# Altium PCB First attempt Science PCB.PcbDoc
Units mm, origin at the board's own origin, x right, y up, seen from the top; angles counter-clockwise.
Board outline 226.44 x 159.77 mm, 2 copper layers (Top Layer, Bottom Layer); 136 components, 117 nets, 420 pads, 18 vias.
Unrouted connection lines stored in the file: 47.
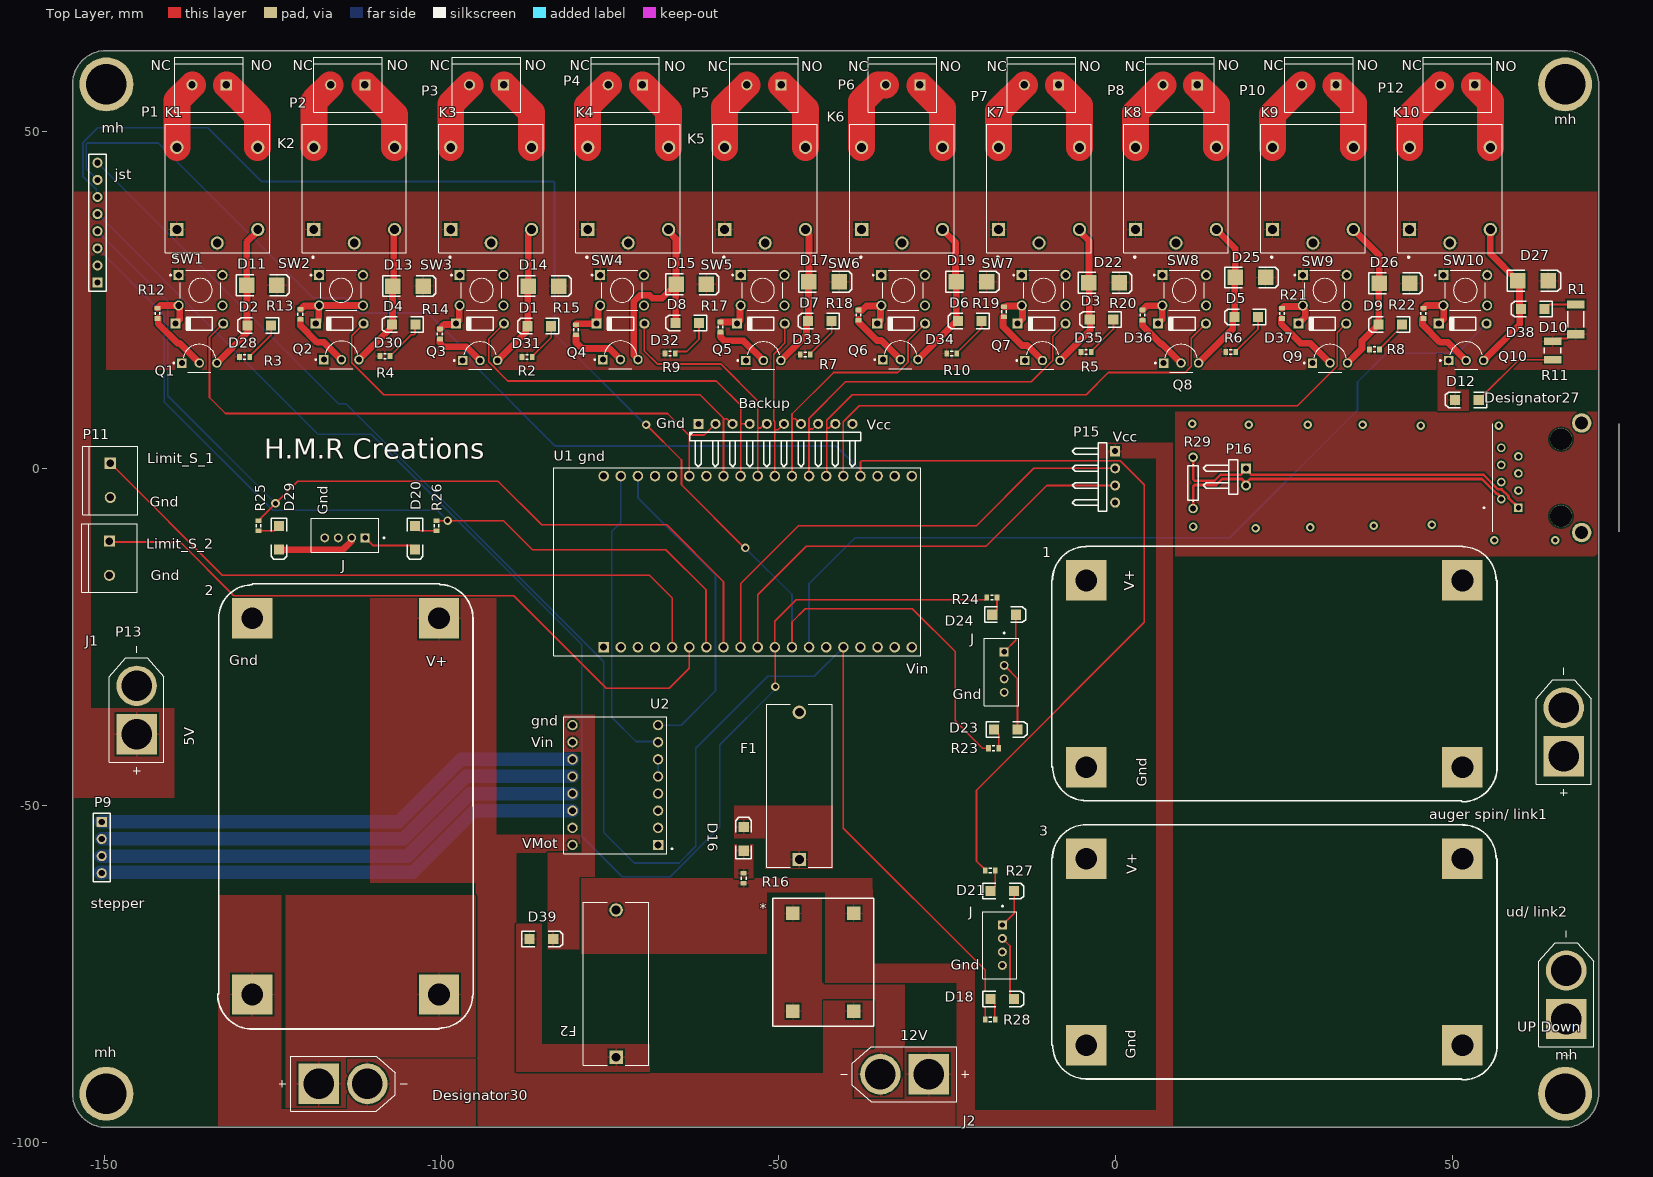
[diagram p0: Top Layer view]
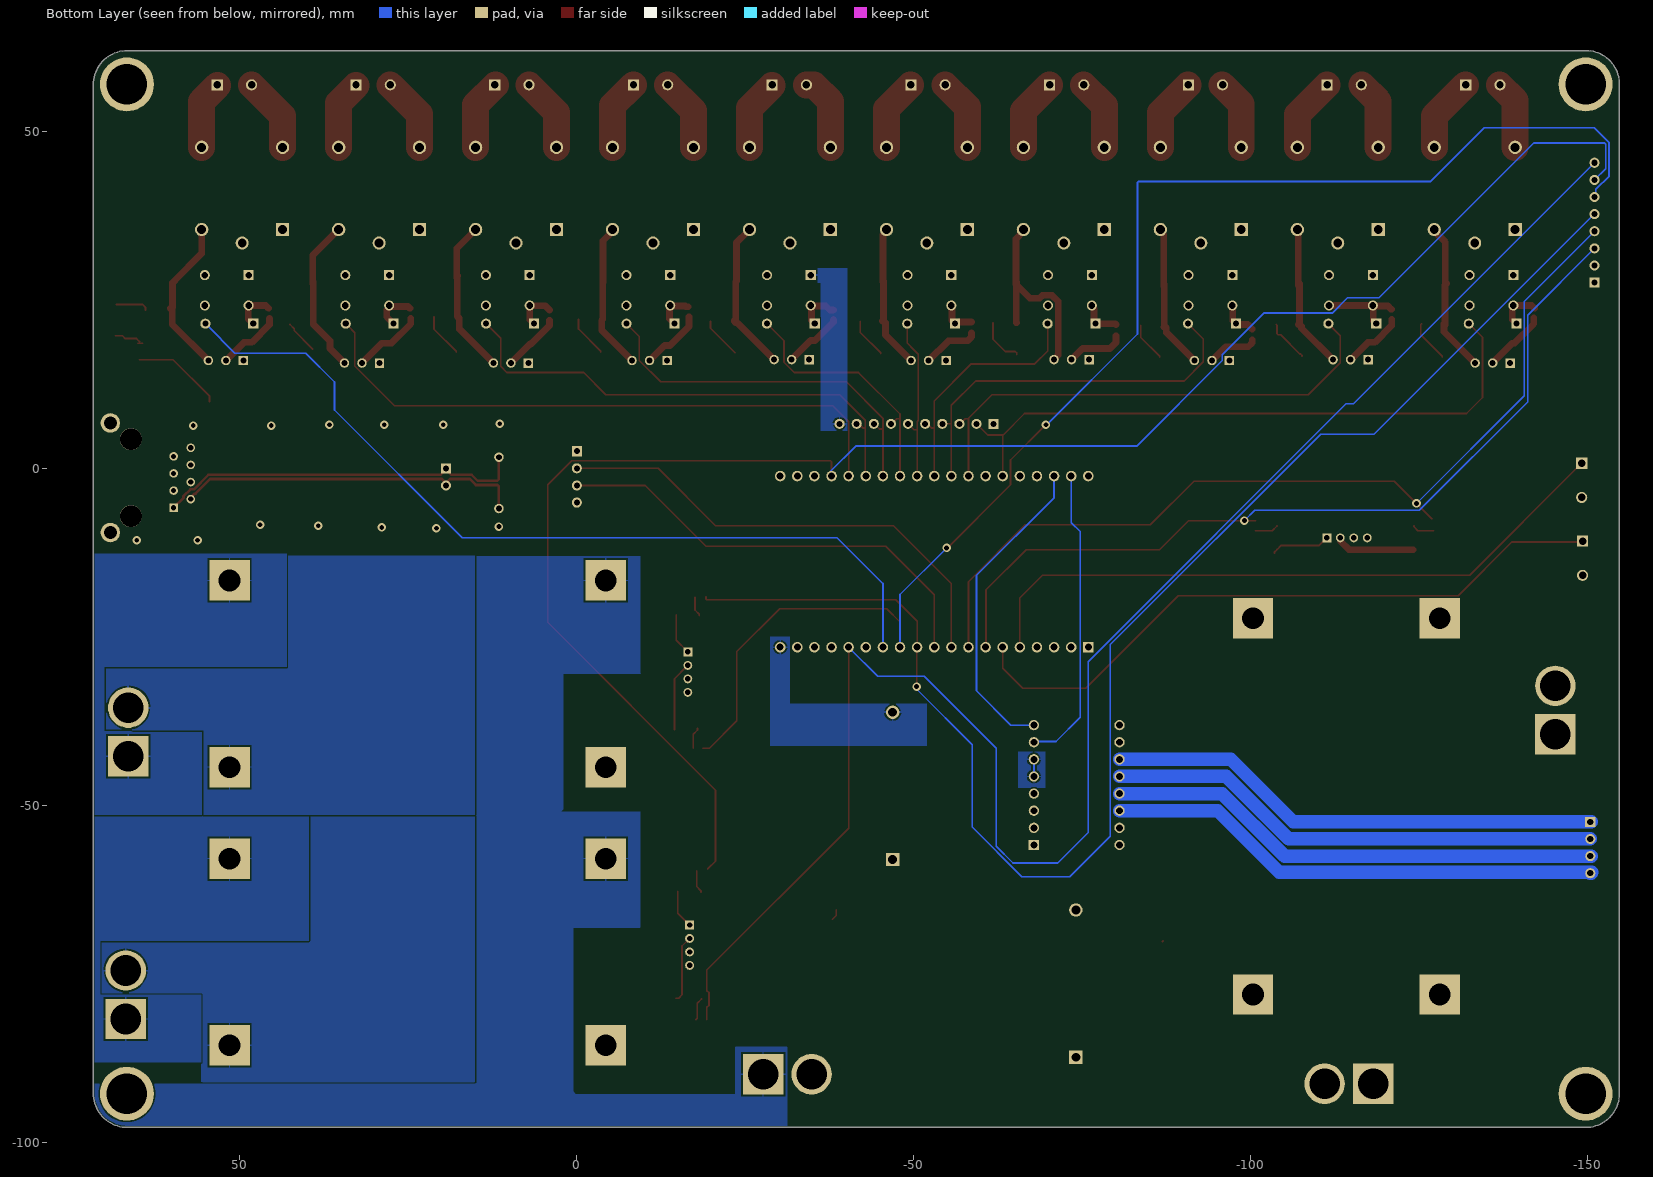
[diagram p1: Bottom Layer view, seen from below]

## Layer stack, top to bottom
Top Solder: solder mask 0.0102, Solder Resist, Dk 3.5
Top Layer: signal copper 0.0356
Dielectric 1: dielectric 0.32, FR-4, Dk 4.8
Bottom Layer: signal copper 0.0356
Bottom Solder: solder mask 0.0102, Solder Resist, Dk 3.5

## Board outline
-154.686,-92.79 -154.686,57.023 cw(c-149.733,57.023) -149.733,61.976 66.675,61.976 cw(c66.675,56.896) 71.755,56.896 71.755,-92.71 cw(c66.675,-92.71) 66.675,-97.79 -149.686,-97.79 cw(c-149.686,-92.79)

## Design rules (kind name [scope] priority, off if disabled: settings)
BoardOutlineClearance [All] p1: gap=0.254 ignorepadtopadclearanceinfootprint=FALSE except(0: Arc-SplitContinuation Track-SplitContinuation SMDPad-SplitContinuation THPad-SplitContinuation Via-SplitContinuation Fill-SplitContinuation Poly-SplitContinuation Region-SplitContinuation Text-SplitContinuation)
Clearance [All] p1: gap=0.254 ignorepadtopadclearanceinfootprint=FALSE except(0: Arc-Hole Track-Hole SMDPad-Hole THPad-Hole Via-Hole Fill-Hole Poly-Hole Region-Hole Text-Hole)
DiffPairsRouting [All] p1: maxlimit=0.254 minlimit=0.254 mostfreqgap=0.254 toplayer_minwidth=0.381 toplayer_maxwidth=0.381 toplayer_prefwidth=0.381 bottomlayer_minwidth=0.381 bottomlayer_maxwidth=0.381 bottomlayer_prefwidth=0.381 maxuncoupledlength=12.7
PolygonConnect [All] p1: connectstyle=Relief reliefconductorwidth=0.254 reliefentries=4 polygonreliefangle="90 Angle" airgapwidth=0.254
RoutingVias [All] p1: holewidth=0.711 width=1.27 viastyle="Through Hole" minholewidth=0.711 minwidth=1.27 maxholewidth=0.711 maxwidth=1.27
SolderMaskExpansion [All] p1: expansion=0.102 istentingtop=FALSE
Width [InNetClass('New Class')] p1: maxlimit=5 minlimit=1 preferedwidth=1 minimp=50.000000 maximp=50.000000 favimp=50.000000
29 further rules are at their usual default settings.

## Classes and differential pairs
net class "New Class": NetD1_2 NetD2_2 NetD3_2 NetD4_2 NetD5_2 NetD6_2 NetD7_2 NetD8_2 NetD9_2 NetD10_2 NetD28_2 NetD29_2 NetD30_2 NetD31_2 NetD32_2 NetD33_2 NetD34_2 NetD35_2 NetD36_2 NetD37_2 NetD38_2 NetD39_2 NetQ1_2 NetQ2_2 NetQ3_2 NetQ4_2 NetQ5_2 NetQ6_2 NetQ7_2 NetQ8_2 NetQ9_2 NetQ10_2
component class Sheet2: 1 2 3 * D1 D2 D3 D4 D5 D6 D7 D8 D9 D10 D11 D12 D13 D14 D15 D16 D17 D19 D20 D21 D22 D23 D24 D25 D26 D27 D28 D29 D30 D31 D32 D33 D34 D35 D36 D37 D38 D39 F1 F2 J J1 J2 K1 K2 K3 K4 K5 K6 K7 K8 K9 K10 P1 P2 P3 P4 P5 P6 P7 P8 P9 P10 P11 P12 P13 P15 P16 Q1 Q2 Q3 Q4 Q5 Q6 Q7 Q8 Q9 Q10 R1 R2 R3 R4 R5 R6 R7 R8 R9 R10 R11 R12 R13 R14 R15 R16 R17 R18 R19 R20 R21 R22 R23 R24 R25 R26 R27 R28 R29 SW1 SW2 SW3 SW4 SW5 SW6 SW7 SW8 SW9 SW10 U1 U2
differential pair can: +can_P -can_N

## Components (designator, comment, footprint, x,y, rotation, side; value= is the part's Value field where it differs from the comment)
1 "cytron_md_horizontal_p" Cytron_md 23.622,-30.48 r270 top
2 "cytron_md_horizontal_p" Cytron_md -114.173,-50.165 r180 top
3 "cytron_md_horizontal_p" Cytron_md 23.622,-71.755 r270 top
* "micro_buck" PCBComponent_1 -43.307,-73.279 r180 top
"auger spin/ link1" "Comment" AMASS_XT60-M 66.548,-39.116 r90 top
Backup "Comment" HDR1X10H -61.849,6.604 r0 top
D1 "LED2" 3.2X1.6X1.1 -85.471,21.082 r180 top
D2 "LED2" 3.2X1.6X1.1 -127,21.209 r180 top
D3 "LED2" 3.2X1.6X1.1 -2.032,22.098 r180 top
D4 "LED2" 3.2X1.6X1.1 -105.537,21.336 r180 top
D5 "LED2" 3.2X1.6X1.1 19.431,22.479 r180 top
D6 "LED2" 3.2X1.6X1.1 -21.59,21.844 r180 top
D7 "LED2" 3.2X1.6X1.1 -43.815,21.844 r180 top
D8 "LED2" 3.2X1.6X1.1 -63.5,21.59 r180 top
D9 "LED2" 3.2X1.6X1.1 40.795,21.336 r180 top
D10 "LED2" 3.2X1.6X1.1 61.976,23.622 r180 top
D11 "D Schottky" SMB -126.619,27.178 r0 top
D12 "LED2" 3.2X1.6X1.1 52.197,10.16 r180 top
D13 "D Schottky" SMB -104.902,27.051 r0 top
D14 "D Schottky" SMB -84.836,27.051 r0 top
D15 "D Schottky" SMB -62.901,27.305 r0 top
D16 "LED2" 3.2X1.6X1.1 -55.118,-54.991 r90 top
D17 "D Schottky" SMB -43.18,27.686 r0 top
D18 "LED2" 3.2X1.6X1.1 -16.744,-78.74 r0 top
D19 "D Schottky" SMB -21.336,27.686 r0 top
D20 "LED2" 3.2X1.6X1.1 -103.886,-10.307 r270 top
D21 "LED2" 3.2X1.6X1.1 -16.744,-62.738 r0 top
D22 "D Schottky" SMB -1.651,27.559 r0 top
D23 "LED2" 3.2X1.6X1.1 -16.236,-38.735 r0 top
D24 "LED2" 3.2X1.6X1.1 -16.49,-21.717 r0 top
D25 "D Schottky" SMB 20.066,28.321 r0 top
D26 "D Schottky" SMB 41.438,27.432 r0 top
D27 "D Schottky" SMB 61.976,27.813 r0 top
D28 "Diode 1N914" DO-35 -135.89,21.463 r180 top
D29 "LED2" 3.2X1.6X1.1 -124.079,-10.307 r270 top
D30 "Diode 1N914" DO-35 -115.062,21.463 r180 top
D31 "Diode 1N914" DO-35 -94.234,21.463 r180 top
D32 "Diode 1N914" DO-35 -73.406,21.463 r180 top
D33 "Diode 1N914" DO-35 -52.578,21.463 r180 top
D34 "Diode 1N914" DO-35 -31.75,21.463 r180 top
D35 "Diode 1N914" DO-35 -10.922,21.463 r180 top
D36 "Diode 1N914" DO-35 9.906,21.463 r180 top
D37 "Diode 1N914" DO-35 30.734,21.463 r180 top
D38 "Diode 1N914" DO-35 51.562,21.463 r180 top
D39 "LED2" 3.2X1.6X1.1 -85.133,-69.85 r0 top
Designator27 "Comment" TE_RJ45-8N3-B 59.817,-1.397 r90 top
Designator30 "Comment" AMASS_XT60-M -114.554,-91.313 r0 top
F1 "4527" FUSE_4527 -46.863,-47.117 r90 top
F2 "4527" FUSE_4527 -74.041,-76.454 r90 top
J "110990030" SEEED_110990030 -16.73,-70.755 r270 top
J "110990030" SEEED_110990030 -114.284,-10.321 r180 top
J "110990030" SEEED_110990030 -16.476,-30.242 r270 top
J1 "XT60-M" AMASS_XT60-M -145.18,-35.868 r90 top locked
J2 "XT60-M" AMASS_XT60-M -31.242,-89.896 r180 top locked
jst "Comment" HDR1X8 -151.003,27.559 r90 top
K1 "SRD-05VDC-SL-C" RELAY_SRD-05VDC-SL-C -133.223,41.529 r90 top
K2 "SRD-05VDC-SL-C" RELAY_SRD-05VDC-SL-C -112.903,41.529 r90 top
K3 "SRD-05VDC-SL-C" RELAY_SRD-05VDC-SL-C -92.583,41.529 r90 top
K4 "SRD-05VDC-SL-C" RELAY_SRD-05VDC-SL-C -72.263,41.529 r90 top
K5 "SRD-05VDC-SL-C" RELAY_SRD-05VDC-SL-C -51.943,41.529 r90 top
K6 "SRD-05VDC-SL-C" RELAY_SRD-05VDC-SL-C -31.623,41.529 r90 top
K7 "SRD-05VDC-SL-C" RELAY_SRD-05VDC-SL-C -11.303,41.529 r90 top
K8 "SRD-05VDC-SL-C" RELAY_SRD-05VDC-SL-C 9.017,41.529 r90 top
K9 "SRD-05VDC-SL-C" RELAY_SRD-05VDC-SL-C 29.337,41.529 r90 top
K10 "SRD-05VDC-SL-C" RELAY_SRD-05VDC-SL-C 49.657,41.529 r90 top
mh "Comment" np_20A_mountinghole#1 -148.209,-93.599 r0 top
mh "Comment" np_20A_mountinghole#2 65.786,-94.869 r0 top
mh "Comment" np_20A_mountinghole#3 65.786,56.134 r0 top
mh "Comment" np_20A_mountinghole#4 -149.098,57.023 r0 top
P1 "282837-2" TE_282837-2 -134.436,56.896 r180 top
P2 "282837-2" TE_282837-2 -113.855,56.896 r180 top
P3 "282837-2" TE_282837-2 -93.273,56.896 r180 top
P4 "282837-2" TE_282837-2 -72.691,56.896 r180 top
P5 "282837-2" TE_282837-2 -52.109,56.896 r180 top
P6 "282837-2" TE_282837-2 -31.527,56.896 r180 top
P7 "282837-2" TE_282837-2 -10.945,56.896 r180 top
P8 "282837-2" TE_282837-2 9.636,56.896 r180 top
P9 "Header 4" HDR1X4 -150.368,-52.451 r270 top
P10 "282837-2" TE_282837-2 30.218,56.896 r180 top
P11 "282837-2" TE_282837-2 -149.098,-1.778 r270 top
P12 "282837-2" TE_282837-2 50.8,56.896 r180 top
P13 "282837-2" TE_282837-2 -149.225,-13.335 r270 top
P15 "Header 4H" HDR1X4H 0,2.54 r270 top locked
P16 "Header 2H" HDR1X2H 19.42,0 r270 top locked
Q1 "LP395Z/NOPB" TO-92 -135.89,15.621 r0 top
Q2 "LP395Z/NOPB" TO-92 -114.808,16.119 r0 top
Q3 "LP395Z/NOPB" TO-92 -94.234,16.002 r0 top
Q4 "LP395Z/NOPB" TO-92 -73.406,16.129 r0 top
Q5 "LP395Z/NOPB" TO-92 -52.197,16.002 r0 top
Q6 "LP395Z/NOPB" TO-92 -31.877,16.129 r0 top
Q7 "LP395Z/NOPB" TO-92 -10.795,16.002 r0 top
Q8 "LP395Z/NOPB" TO-92 9.779,15.621 r0 top
Q9 "LP395Z/NOPB" TO-92 31.877,15.621 r0 top
Q10 "LP395Z/NOPB" TO-92 52.07,16.002 r0 top
R1 "Res3" 12Z-2010 68.326,22.098 r270 top value=1K
R2 "Res3" J1-0603 -87.249,16.51 r180 top value=1K
R3 "Res3" J1-0603 -129.171,16.51 r180 top value=1K
R4 "Res3" J1-0603 -108.343,16.637 r180 top value=1K
R5 "Res3" J1-0603 -4.318,17.272 r180 top value=1K
R6 "Res3" J1-0603 17.145,17.272 r180 top value=1K
R7 "Res3" J1-0603 -45.974,16.891 r180 top value=1K
R8 "Res3" J1-0603 38.481,17.653 r180 top value=1K
R9 "Res3" J1-0603 -66.04,17.018 r180 top value=1K
R10 "Res3" J1-0603 -24.257,17.018 r180 top value=1K
R11 "Res3" 14-1210 64.897,17.479 r90 top value=1K
R12 "Res3" J1-0603 -142.113,22.987 r270 top value=1K
R13 "Res3" J1-0603 -120.904,22.86 r270 top value=1K
R14 "Res3" J1-0603 -100.203,19.939 r270 top value=1K
R15 "Res3" J1-0603 -80.01,20.574 r270 top value=1K
R16 "Res3" J1-0603 -55.118,-60.821 r90 top value=1K
R17 "Res3" J1-0603 -58.547,20.967 r270 top value=1K
R18 "Res3" J1-0603 -38.1,22.733 r270 top value=1K
R19 "Res3" J1-0603 -16.51,23.241 r270 top value=1K
R20 "Res3" J1-0603 4.064,22.733 r270 top value=1K
R21 "Res3" J1-0603 24.765,22.987 r270 top value=1K
R22 "Res3" J1-0603 45.72,22.987 r270 top value=1K
R23 "Res3" J1-0603 -18.034,-41.529 r0 top value=1K
R24 "Res3" J1-0603 -18.288,-19.177 r0 top value=1K
R25 "Res3" J1-0603 -127.127,-8.509 r270 top value=1K
R26 "Res3" J1-0603 -100.711,-8.509 r270 top value=1K
R27 "Res3" J1-0603 -18.542,-59.69 r0 top value=1K
R28 "Res3" J1-0603 -18.542,-81.788 r0 top value=1K
R29 "Res1" AXIAL-0.3 11.557,-2.159 r90 top locked value=1K
SW1 "1825910-6" SW_1825910-6-4 -135.711,26.416 r0 top
SW2 "1825910-6" SW_1825910-6-4 -114.861,26.416 r0 top
SW3 "1825910-6" SW_1825910-6-4 -94.01,26.416 r0 top
SW4 "1825910-6" SW_1825910-6-4 -73.16,26.416 r0 top
SW5 "1825910-6" SW_1825910-6-4 -52.309,26.416 r0 top
SW6 "1825910-6" SW_1825910-6-4 -31.459,26.416 r0 top
SW7 "1825910-6" SW_1825910-6-4 -10.608,26.416 r0 top
SW8 "1825910-6" SW_1825910-6-4 10.242,26.416 r0 top
SW9 "1825910-6" SW_1825910-6-4 31.093,26.416 r0 top
SW10 "1825910-6" SW_1825910-6-4 51.943,26.416 r0 top
U1 "ESP32-DEVKITC-32D" MODULE_ESP32-DEVKITC-32D -56.134,-13.843 r90 top
U2 "A4988_STEPPER_MOTOR_DRIVER_CARRIER" MODULE_A4988_STEPPER_MOTOR_DRIVER_CARRIER -74.168,-46.99 r180 top
"ud/ link2" "Comment" AMASS_XT60-M 66.929,-78.105 r90 top

## Footprints (in the part's own frame and the unit in brackets; to place one, negate y for a bottom-side part, rotate by r counter-clockwise, add the part's x,y. Pads: shape width x height; smd on the part's side, far side on the other; paste and mask are expansions set on the pad)
3.2X1.6X1.1 [mm] "SMT LED; 2 Flat Leads"
  rect 1.5x1.5 smd: 1(-1.75,0) 2(1.75,0)
  silkscreen extent -2.9,-1.15 3.2,1.15
12Z-2010 [mm] "Chip Resistor, Body 5.0x2.5mm, IPC High Density"
  rect 1.2x2.6 smd: 1(-2.2,0) 2(2.2,0)
  silkscreen extent -1.2,-1.2 1.2,1.2, body extent -2.58,-1.33 2.58,1.33, height 0.9
14-1210 [mm] "Chip Resistor, Body 3.2x2.5mm, IPC High Density"
  rect 1.1x2.6 smd: 1(-1.35,0) 2(1.35,0)
  silkscreen extent -0.4,-1.2 0.4,1.2, body extent -1.68,-1.32 1.68,1.32, height 0.9
AMASS_XT60-M [mm]
  round 6 hole 4.55: N(3.6,0)
  rect 6x6 hole 4.55: P(-3.6,0)
  silkscreen extent -9.5,-4.05 9.5,4.05, body extent -4.05,0 4.05,20.5, height 7.75
AXIAL-0.3 [mm] "Axial Device, Thru-Hole; 2 Leads; 0.3 in Pin Spacing"
  round 1.4 hole 0.85: 1(-3.81,0) 2(3.81,0)
  silkscreen extent -2.77,-0.76 2.77,0.76
Cytron_md [mm]
  rect 6x6 hole 3.22: 1(-13.85,27.9) 2(13.85,27.9) 3(-13.85,-27.9) 4(13.85,-27.9)
  silkscreen extent -18.92,-33.02 18.98,33.03
DO-35 [mm] "Diode, Axial; Body 3.8 x 1.9 mm (LxDia. max), Lead Dia. 0.53 mm (max)"
  round 1.5 hole 0.9: 1(-3.55,0)
  rect 1.5x1.5 hole 0.9: 2(3.55,0)
  silkscreen extent -1.95,-0.95 2.05,0.95
FUSE_4527 [mm]
  rect 1.98x1.98 hole 1.32: 1(-10.92,0)
  round 1.98 hole 1.32: 2(10.92,0)
  silkscreen extent -12.08,-4.85 12.08,4.85
HDR1X2H [mm] "Connector; Header; 2 Position; Right Angle"
  rect 1.5x1.5 hole 0.9: 1(0,0)
  round 1.5 hole 0.9: 2(2.54,0)
  silkscreen extent -1.27,-6.35 3.81,-1.27
HDR1X4 [mm] "Connector; Header; 4 Position"
  rect 1.5x1.5 hole 0.9: 1(0,0)
  round 1.5 hole 0.9: 2(2.54,0) 3(5.08,0) 4(7.62,0)
  silkscreen extent -1.27,-1.27 8.89,1.27
HDR1X4H [mm] "Connector; Header; 4 Position; Right Angle"
  rect 1.5x1.5 hole 0.9: 1(0,0)
  round 1.5 hole 0.9: 2(2.54,0) 3(5.08,0) 4(7.62,0)
  silkscreen extent -1.27,-6.35 8.89,-1.27
HDR1X8 [mm] "Connector; Header; 8 Position"
  round 1.5 hole 0.9: 2(2.54,0) 3(5.08,0) 4(7.62,0) 5(10.16,0) 6(12.7,0) 7(15.24,0) 8(17.78,0)
  rect 1.5x1.5 hole 0.9: ""(0,0)
  silkscreen extent -1.27,-1.27 19.05,1.27
HDR1X10H [mm] "Connector; Header; 10 Position; Right Angle"
  rect 1.5x1.5 hole 0.9: 1(0,0)
  round 1.5 hole 0.9: 2(2.54,0) 3(5.08,0) 4(7.62,0) 5(10.16,0) 6(12.7,0) 7(15.24,0) 8(17.78,0) 9(20.32,0) 10(22.86,0)
  silkscreen extent -1.27,-6.35 24.13,-1.27
J1-0603 [mm] "Chip Resistor, Body 1.6x0.8mm, IPC High Density"
  rect 0.7x0.9 smd: 1(-0.75,0) 2(0.75,0)
  silkscreen extent -0.2,-0.35 0.2,0.35, body extent -0.85,-0.48 0.85,0.48, height 0.9
MODULE_A4988_STEPPER_MOTOR_DRIVER_CARRIER [mm]
  rect 1.53x1.53 hole 1.02: 1(-6.35,8.89)
  round 1.53 hole 1.02: 2(-6.35,6.35) 3(-6.35,3.81) 4(-6.35,1.27) 5(-6.35,-1.27) 6(-6.35,-3.81) 7(-6.35,-6.35) 8(-6.35,-8.89) 9(6.35,-8.89) 10(6.35,-6.35) 11(6.35,-3.81) 12(6.35,-1.27) 13(6.35,1.27) 14(6.35,3.81) 15(6.35,6.35) 16(6.35,8.89)
  silkscreen extent -8.5,-10.16 7.62,10.16
MODULE_ESP32-DEVKITC-32D [mm]
  rect 1.56x1.56 hole 1.04: 1(-12.7,19.76)
  round 1.56 hole 1.04: 2(-12.7,17.22) 3(-12.7,14.68) 4(-12.7,12.14) 5(-12.7,9.6) 6(-12.7,7.06) 7(-12.7,4.52) 8(-12.7,1.98) 9(-12.7,-0.56) 10(-12.7,-3.1) 11(-12.7,-5.64) 12(-12.7,-8.18) 13(-12.7,-10.72) 14(-12.7,-13.26) 15(-12.7,-15.8) 16(-12.7,-18.34) 17(-12.7,-20.88) 18(-12.7,-23.42) 19(-12.7,-25.96) 20(12.7,19.76) 21(12.7,17.22) 22(12.7,14.68) 23(12.7,12.14) 24(12.7,9.6) 25(12.7,7.06) 26(12.7,4.52) 27(12.7,1.98) 28(12.7,-0.56) 29(12.7,-3.1) 30(12.7,-5.64) 31(12.7,-8.18) 32(12.7,-10.72) 33(12.7,-13.26) 34(12.7,-15.8) 35(12.7,-18.34) 36(12.7,-20.88) 37(12.7,-23.42) 38(12.7,-25.96)
  silkscreen extent -13.95,-27.25 13.95,27.15
np_20A_mountinghole#1 [mm]
  round 8 hole 6 unplated: MH_NP_6mm(-1.477,0.809)
np_20A_mountinghole#2 [mm]
  round 8 hole 6 unplated: MH_NP_6mm(0.969,2.079)
np_20A_mountinghole#3 [mm]
  round 8 hole 6 unplated: MH_NP_6mm(0.969,0.842)
np_20A_mountinghole#4 [mm]
  round 8 hole 6 unplated: MH_NP_6mm(-0.588,-0.047)
PCBComponent_1 [mm]
  rect 2x2 smd: 1(-4.5,7.25) 2(4.5,7.25) 3(-4.5,-7.25) 4(4.5,-7.25)
  silkscreen extent -7.5,-9.5 7.5,9.5
RELAY_SRD-05VDC-SL-C [mm]
  rect 1.98x1.98 / inner round 1.98 / far side rect 1.98x1.98 hole 1.32: A1(-6.1,6)
  round 1.98 hole 1.32: A2(-6.1,-6) NC(6.1,6) NO(6.1,-6)
  round 1.935 hole 1.29: COM(-8.1,0)
  silkscreen extent -10.3,-7.75 9.55,7.75, body extent -9.6,-7.8 9.6,7.8, height 15.8
SEEED_110990030 [mm]
  rect 1.308x1.308 hole 0.8: 1(-3,0)
  round 1.308 hole 0.8: 2(-1,0) 3(1,0) 4(3,0)
  silkscreen extent -5.9,-2.95 5,2.15
SMB [mm] "DO-214-AA/SMB; 2 C-Bend Leads; Body 5.3 x 3.6 mm, inc. leads (LxW)"
  rect 2.3x2.3 smd: 1(-2.25,0) 2(2.25,0)
  silkscreen extent -3.8,-1.55 4.1,1.55
SW_1825910-6-4 [mm]
  rect 1.498x1.498 hole 0.99: 1(-3.25,2.25)
  round 1.498 hole 0.99: 2(3.25,2.25) 3(-3.25,-2.25) 4(3.25,-2.25)
  silkscreen extent -4.54,-3 3,3
TE_282837-2 [mm]
  rect 1.65x1.65 hole 1.1: 1(-2.54,0)
  round 1.65 hole 1.1: 2(2.54,0)
  silkscreen extent -5.08,-4.1 5.08,4.1
TE_RJ45-8N3-B [mil]
  rect 50x50 hole 30: 1(-175,0)
  round 50 hole 30: 2(-125,100) 3(-75,0) 4(-25,100) 5(25,0) 7(125,0) 8(175,100)
  round 49.92 hole 29.92: 6(75,100)
  round 114 hole 76: 9(-320,-370) 10(320,-370)
  round 128 hole 128 unplated: ""(-225,-250) ""(225,-250)
  silkscreen extent -315,-590 315,204
TO-92 [mm]
  rect 1.4x1.4 hole 0.9: 1(-2.6,0)
  round 1.4 hole 0.9: 2(0,0) 3(2.6,0)
  silkscreen extent -3.86,-1.33 2.41,2.77, body extent -2.41,0 2.41,3.68, height 5.34

## Part data
*: library part Component_1
D1 D2 D3 D4 D5 D6 D7 D8 D9 D10 D12 D16 D18 D20 D21 D23 D24 D29 D39: "Typical RED, GREEN, YELLOW, AMBER GaAs LED", LatestRevisionDate=17-Jul-2002, LatestRevisionNote="Re-released for DXP Platform.", PackageDescription="SM LED; 2 Flat Leads", PackageReference=3.2X1.6X1.1, PackageVersion=Feb-2002, Published=8-Jun-2000, Publisher="Altium Limited"
D11 D13 D14 D15 D17 D19 D22 D25 D26 D27: "Schottky Diode", Code_JEDEC=DO-214-AA, LatestRevisionDate=17-Jul-2002, LatestRevisionNote="Re-released for DXP Platform.", PackageDescription="DO-214-AA/SMB; 2 C-Bend Leads; Body 5.3 x 3.6 mm, inc. leads (LxW)", PackageReference=SMB, Published=8-Jun-2000, Publisher="Altium Limited"
D28 D30 D31 D32 D33 D34 D35 D36 D37 D38: "High Conductance Fast Diode", Code_JEDEC=DO-204-AH, ComponentLink1Description="Manufacturer Link", ComponentLink1URL=http://www.fairchildsemi.com/, ComponentLink2Description=Datasheet, ComponentLink2URL=http://www.fairchildsemi.com/ds/1N%2F1N4448.pdf, DatasheetVersion=1997, LatestRevisionDate=17-Jul-2002, LatestRevisionNote="Re-released for DXP Platform.", PackageDescription="Diode, Axial; Body 3.8 x 1.9 mm (LxDia. max), Lead Dia. 0.53 mm (max)", PackageReference=DO-35, Published=8-Jun-2000, Publisher="Altium Limited"
F1 F2: "Fuseholder; 5 A; 250 V; Nylon; Base only; Brass, Tin Plate (Contact)", Package=None, Availability=Unavailable, MP=4527, Price=None
J J J: "GROVE 2MM 4PIN VERT CONN 10PCS", Package=None, Arrow_Electronics-Purchase-URL=https://snapeda.com/shop?store=Arrow+Electronics&id=583576, Availability=Good, MF="Seeed Technology", Mouser-Purchase-URL=https://snapeda.com/shop?store=Mouser&id=583576, MP=110990030, Price=None, SnapEDA_Link=https://www.snapeda.com/parts/110990030/Seeed%20Technology%20Co.,%20Ltd/view-part/583576/?ref=snap
J1 J2: "Plug; DC supply; XT60; male; PIN: 2; for cable; soldered; 30A; 500V", Package=Package, Availability="Not in stock", Check_prices=https://www.snapeda.com/parts/XT60-M/AMASS/view-part/?ref=eda, MF=AMASS, MP=XT60-M, Price=None, SnapEDA_Link=https://www.snapeda.com/parts/XT60-M/AMASS/view-part/?ref=snap
K1 K2 K3 K4 K5 K6 K7 K8 K9 K10: "5V Trigger Relay Module For Arduino And Raspberry Pi 5V Trigger Relay Module For Arduino And Raspberry Pi", Package="NON STANDARD-5 Songle Relay", Availability="Not in stock", Check_prices=https://www.snapeda.com/parts/SRD-05VDC-SL-C/Songle+Relay/view-part/?ref=eda, MF="Songle Relay", MP=SRD-05VDC-SL-C, Price=None, SnapEDA_Link=https://www.snapeda.com/parts/SRD-05VDC-SL-C/Songle+Relay/view-part/?ref=snap
P1 P2 P3 P4 P5 P6 P7 P8 P10 P11 P12 P13: "TERM BLOCK 5.08MM 2POS SIDE ENTY", Package=None, Availability=Unavailable, MP=282837-2, Price=None
P9: "Header, 4-Pin", LatestRevisionDate=17-Jul-2002, LatestRevisionNote="Re-released for DXP Platform.", Publisher="Altium Limited"
P15: "Header, 4-Pin, Right Angle", LatestRevisionDate=17-Jul-2002, LatestRevisionNote="Re-released for DXP Platform.", Publisher="Altium Limited"
P16: "Header, 2-Pin, Right Angle", LatestRevisionDate=17-Jul-2002, LatestRevisionNote="Re-released for DXP Platform.", Publisher="Altium Limited"
Q1 Q2 Q3 Q4 Q5 Q6 Q7 Q8 Q9 Q10: "36-V power transistor 3-TO-92 -40 to 125", Package="TO-92-3 Texas Instruments", Availability=Good, Check_prices=https://www.snapeda.com/parts/LP395Z/NOPB/Texas%20Instruments/view-part/809923/?ref=eda, MF="Texas Instruments", MP=LP395Z/NOPB, Price=None, Purchase-URL=https://pricing.snapeda.com/search/part/LP395Z/NOPB/?ref=eda, SnapEDA_Link=https://www.snapeda.com/parts/LP395Z/NOPB/Texas%20Instruments/view-part/809923/?ref=snap
R1 R2 R3 R4 R5 R6 R7 R8 R9 R10 R11 R12 R13 R14 R15 R16 R17 R18 R19 R20 R21 R22 R23 R24 R25 R26 R27 R28 R29: "Resistor", Published=8-Jun-2000, Publisher="Altium Limited"
  R1 R2 R3 R4 R5 R6 R7 R8 R9 R10 R11 R12 R13 R14 R15 R16 R17 R18 R19 R20 R21 R22 R23 R24 R25 R26 R27 R28: LatestRevisionDate=29-May-2009, LatestRevisionNote="IPC-7351 Footprint Added.", PackageDescription="Chip Resistor", PackageReference=J1-0603
  R29: LatestRevisionDate=17-Jul-2002, LatestRevisionNote="Re-released for DXP Platform.", PackageDescription="Axial Device, Thru-Hole; 2 Leads; 0.3 in Pin Spacing", PackageReference=AXIAL-0.3
SW1 SW2 SW3 SW4 SW5 SW6 SW7 SW8 SW9 SW10: "Switch Tactile OFF (ON) SPST Round Button PC Pins 0.05A 24VDC 100000Cycles 1.57N Thru-Hole Loose", Package=None, Availability=Unavailable, MP=1825910-6, Price=None
U1: "Eval Board For Esp-Wroom-32", Package=None, Availability=Unavailable, MP=ESP32-DEVKITC-32D, Price=None
U2: "Stepper motor controler; IC: A4988; 1A; Uin mot: 8Ã·35V", Package=None, Availability=Unavailable, MP=A4988_STEPPER_MOTOR_DRIVER_CARRIER, Price=None

## Via types
v1: diameter 1.27, hole 0.711, Top Layer to Bottom Layer, 18 vias

## Nets (pads, with @x,y where several pads share a name; then routed paths per layer and width w, separated by ;. In a path a pad name is that pad's centre, name@x,y a point inside that pad or via, vN(x,y) a via of type N, cw(c..) or ccw(c..) an arc to the next point about the centre after c; other vN are vias at no path point)
can_N: Designator27.2 P16.2 R29.1 | length 51.7
  Top Layer w0.381: R29.1 11.557,-2.7 11.78,-2.476 14.99,-2.476 15.879,-1.587 18.819,-1.587 19.042,-1.811 19.042,-1.86 P16.2@19.42,-2.237 ; P16.2 P16.2@19.42,-2.237 ; Designator27.2 57.277,-4.331 56.935,-3.99 56.935,-3.97 56.712,-3.746 56.567,-3.746 54.408,-1.587 20.021,-1.587 19.798,-1.811 19.798,-1.86 P16.2@19.42,-2.237
can_P: Designator27.1 P16.1 R29.2 | length 55.8
  Top Layer w0.381: R29.2 11.557,-1.618 11.78,-1.841 14.727,-1.841 15.616,-0.953 18.637,-0.953 18.86,-0.729 18.86,-0.56 P16.1 19.98,-0.56 19.98,-0.729 20.203,-0.953 54.671,-0.953 56.83,-3.111 57.343,-3.111 58.358,-4.126 58.358,-4.383 Designator27.1 Designator27.1@60.261,-5.397
GND: 1.4 2.4 3.4 *.2 *.4 Backup.1 D12.2 Designator27.3 J1.N J2.N J.4 jst. jst.2 P11.2 P13.2 P15.4 Q1.1 Q2.1 Q3.1 Q4.1 Q5.1 Q6.1 Q7.1 Q8.1 Q9.1 Q10.1 U1.20 U2.9 U2.15
  other v1: 20.828,-8.89 28.956,-8.763 11.557,-8.636 38.354,-8.509 46.99,-8.382 45.339,6.35 56.896,6.35 19.812,6.477 28.575,6.477 36.703,6.477 11.43,6.604
Net1_1: 1.1 "auger spin/ link1.P"
Net1_2: 1.2 "auger spin/ link1.N"
Net1_3: 1.3 2.3 3.3 *.1 J2.P U2.16
Net2_1: 2.1 Designator30.P
Net2_2: 2.2 Designator30.N
Net3_1: 3.1 "ud/ link2.P"
Net3_2: 3.2 "ud/ link2.N"
Net*_3: *.3 F2.2 P15.1 R16.1 | length 1.6
  Top Layer w0.254: *.3@-38.481,-65.532 -38.481,-66.355 *.3@-37.934,-66.902
NetD1_1: D1.1 R2.1 | length 5.9
  Top Layer w0.254: R2.1 -86.499,16.61 -83.693,19.416 D1.1@-83.693,21.209
NetD1_2: D1.2 D14.1 K3.A2 Q3.3 | length 22
  Top Layer w1: Q3.3 -87.471,20.165 -87.471,20.832 -87.348,20.955 D1.2@-87.122,20.955 ; D1.2 -87.154,21.15 -87.154,27.273 D14.1@-87.122,27.305 ; D14.1 -87.086,34.661 -86.741,35.006 K3.A2@-86.741,35.687
NetD2_1: D2.1 R3.1 | length 6.3
  Top Layer w0.254: R3.1 -128.421,16.61 -125.222,19.809 -125.222,21.336 D2.1@-125.349,21.463
NetD2_2: D2.2 D11.1 K1.A2 Q1.3 | length 22.9
  Top Layer w1: Q1.3 -128.651,20.26 D2.2@-128.651,21.463 ; D11.1@-129.032,27.432 D11.1@-128.869,27.269 ; D11.1 D11.1@-128.869,27.269 ; D2.2 -128.81,21.268 -128.81,27.21 D11.1@-128.869,27.269 ; K1.A2@-127.254,35.306 -127.254,35.169 -128.869,33.554 D11.1@-128.869,27.269
NetD3_1: D3.1 R5.1 | length 6.2
  Top Layer w0.254: R5.1 -3.568,17.372 -0.254,20.686 D3.1@-0.254,22.098
NetD3_2: D3.2 D22.1 K7.A2 Q7.3 | length 21.8
  Top Layer w1: Q7.3 -8.195,16.011 -3.683,20.523 D3.2@-3.683,21.844 ; K7.A2@-5.207,35.433 -5.207,35.068 -3.901,33.762 D22.1@-3.901,27.65 ; D22.1@-3.937,27.686 D22.1@-3.901,27.65 ; D22.1 D22.1@-3.901,27.65 ; D3.2 -3.842,22.157 -3.842,27.591 D22.1@-3.901,27.65
NetD4_1: D4.1 R4.1 | length 6.6
  Top Layer w0.254: R4.1 -107.593,16.737 -107.37,16.96 -107.27,16.96 -104.418,19.812 -104.035,19.812 -103.886,19.961 -103.886,21.209 D4.1@-103.759,21.336
NetD4_2: D4.2 D13.1 K2.A2 Q2.3 | length 22.1
  Top Layer w1: Q2.3 -107.537,20.79 -107.537,21.086 D4.2 ; D13.1@-107.188,27.432 -107.22,27.4 -107.22,21.404 D4.2 ; D13.1 -107.027,27.176 -107.027,35.34 K2.A2@-106.934,35.433 ; D4.2@-107.061,21.336 D4.2
NetD5_1: D5.1 R6.1 | length 6.6
  Top Layer w0.254: R6.1@17.907,17.272 17.907,17.384 21.181,20.658 D5.1
NetD5_2: D5.2 D25.1 K8.A2 Q8.3 | length 23.5
  Top Layer w1: Q8.3 17.431,20.673 17.431,22.257 D5.2@17.653,22.479 ; K8.A2@14.859,35.179 15.267,35.179 17.816,32.63 D25.1 ; D25.1@17.653,28.575 17.748,28.48 17.748,22.547 D5.2
NetD6_1: D6.1 R10.1 | length 6.2
  Top Layer w0.254: R10.1@-23.495,17.145 -23.48,17.145 -19.84,20.785 D6.1
NetD6_2: D6.2 D19.1 K6.A2 Q6.3 | length 22.7
  Top Layer w1: Q6.3 -23.812,21.594 -23.59,21.594 -23.368,21.816 D6.2@-23.368,21.844 ; K6.A2@-25.654,35.179 -25.373,35.179 -23.709,33.515 -23.709,27.809 D19.1 ; D19.1@-23.586,27.671 -23.586,22.09 D6.2
NetD7_1: D7.1 R7.1 | length 6.1
  Top Layer w0.254: R7.1@-45.085,17.018 -45.085,17.13 -42.065,20.15 D7.1
NetD7_2: D7.2 D17.1 K5.A2 Q5.3 | length 21.7
  Top Layer w1: Q5.3 -45.815,19.784 -45.815,21.594 D7.2 ; K5.A2@-45.974,35.433 -45.974,35.195 -45.43,34.651 D17.1 ; D17.1@-45.466,27.813 -45.498,27.781 -45.498,21.912 D7.2 ; D7.2@-45.339,21.844 D7.2
NetD8_1: D8.1 R9.1 | length 7
  Top Layer w0.254: R9.1@-65.278,16.891 -65.278,17.13 -65.067,17.341 -63.558,17.341 -61.75,19.149 D8.1
NetD8_2: D8.2 D15.1 K4.A2 Q4.3 | length 30.8
  Top Layer w1: Q4.3@-71.247,16.637 -71.413,16.803 -71.413,24.789 -70.532,25.669 -69.088,25.669 -68.66,25.241 -67.215,25.241 D15.1@-65.2,27.256 ; K4.A2@-66.294,35.687 -66.294,35.195 -65.151,34.052 D15.1 D15.1@-65.2,27.256 ; D15.1@-65.278,27.559 -65.2,27.481 D15.1@-65.2,27.256 ; D8.2 -65.2,21.64 D15.1@-65.2,27.256
NetD9_1: D9.1 R8.1 | length 5.1
  Top Layer w0.254: R8.1 39.231,17.753 41.922,20.444 41.922,20.713 D9.1
NetD9_2: D9.2 D26.1 K9.A2 Q9.3 | length 23.9
  Top Layer w1: Q9.3 36.627,17.771 36.627,18.918 D9.2 39.116,21.407 D26.1@39.116,27.686 ; K9.A2@35.56,35.814 35.56,35.206 39.188,31.578 D26.1
NetD10_1: D10.1 R1.1 | length 4.9
  Top Layer w0.254: D10.1@64.008,23.495 64.008,23.904 64.402,24.298 R1.1
NetD10_2: D10.2 D27.1 K10.A2 Q10.3 | length 23.9
  Top Layer w1: Q10.3 60.04,21.372 60.04,23.464 D10.2@60.325,23.749 ; K10.A2@55.626,35.306 55.657,35.275 55.657,31.882 D27.1 ; D27.1@59.563,27.94 59.976,27.527 59.976,23.872 60.212,23.636 D10.2
NetD11_2: Backup.10 D11.2 D13.2 D14.2 D15.2 D17.2 D19.2 D22.2 D25.2 D26.2 D27.2 J1.P K1.A1 K1.COM K2.A1 K2.COM K3.A1 K3.COM K4.A1 K4.COM K5.A1 K5.COM K6.A1 K6.COM K7.A1 K7.COM K8.A1 K8.COM K9.A1 K9.COM K10.A1 K10.COM R1.2 R2.2 R3.2 R4.2 R5.2 R6.2 R7.2 R8.2 R9.2 R10.2 R11.2 SW1.1 SW1.2 SW2.1 SW2.2 SW3.1 SW3.2 SW4.1 SW4.2 SW5.1 SW5.2 SW6.1 SW6.2 SW7.1 SW7.2 SW8.1 SW8.2 SW9.1 SW9.2 SW10.1 SW10.2 | length 4.6
  Top Layer w0.254: R11.2@64.434,18.542 R11.2@65.151,18.542 ; R11.2 65.32,19.252 66.98,19.252 67.413,19.685 R1.2@68.453,19.685
NetD12_1: D12.1 R11.1 | length 13.5
  Top Layer w0.254: D12.1@54.483,9.906 54.483,10.696 59.916,16.129 R11.1
NetD16_1: D16.1 R16.2
NetD16_2: D16.2 F1.1
NetD18_1: D18.1 R28.2 | length 3.4
  Top Layer w0.254: D18.1 -17.871,-79.363 -17.871,-81.57 R28.2@-17.653,-81.788
NetD18_2: D18.2 J.2@-16.73,-69.755 | length 9.9
  Top Layer w0.254: J.2@-16.73,-69.755 -15.617,-70.868 -15.617,-78.117 -15.121,-78.613 D18.2@-14.732,-78.613
NetD20_1: D20.1 R26.2 | length 3.5
  Top Layer w0.254: D20.1@-103.886,-8.509 D20.1 -103.184,-9.259 R26.2
NetD20_2: D20.2 J.1@-111.284,-10.321 | length 8.8
  Top Layer w0.254: J.1@-111.284,-10.321 -110.171,-11.434 -104.509,-11.434 D20.2 -103.505,-12.438 D20.2@-103.505,-12.573
NetD21_1: D21.1 R27.2 | length 3.4
  Top Layer w0.254: D21.1@-18.415,-62.865 -18.415,-62.659 -17.792,-62.036 R27.2
NetD21_2: D21.2 J.1@-16.73,-67.755 | length 6
  Top Layer w0.254: J.1@-16.383,-68.199 -16.383,-67.408 -14.994,-66.018 D21.2
NetD23_1: D23.1 R23.2 | length 3.2
  Top Layer w0.254: D23.1@-17.907,-38.608 -17.907,-38.814 -17.284,-39.437 R23.2
NetD23_2: D23.2 J.2@-16.476,-29.242 | length 10.3
  Top Layer w0.254: J.2@-16.256,-29.21 -16.256,-29.462 -14.486,-31.233 D23.2
NetD24_1: D24.1 R24.2 | length 2.9
  Top Layer w0.254: D24.1@-18.161,-21.844 -18.161,-21.638 -17.538,-21.015 R24.2
NetD24_2: D24.2 J.1@-16.476,-27.242 | length 6.3
  Top Layer w0.254: J.1@-16.51,-27.178 -16.412,-27.178 -14.74,-25.505 D24.2
NetD28_1: Backup.2 D28.1 U1.25 | length 96.2
  Top Layer w0.254: D28.1@-132.461,21.717 -132.461,21.342 -134.371,19.432 -134.371,10.502 -131.997,8.128 -66.421,8.128 -63.246,4.953 ; U1.25 -63.194,4.901 -63.246,4.953 ; Backup.2 -60.96,4.953 -63.246,4.953
NetD28_2: D28.2 R12.1 SW1.3 SW1.4 | length 6.5
  Top Layer w1: R12.1 -141.684,24.166 SW1.3 -138.847,24.166 SW1.3@-138.811,24.13 ; D28.2 -138.811,22.092 -138.811,23.876 -138.866,23.931 -138.866,23.936 -139.06,24.13 SW1.3@-139.065,24.13
NetD29_1: D29.1 R25.2 | length 3.3
  Top Layer w0.254: R25.2 -124.781,-9.259 -124.206,-8.684 D29.1@-124.206,-8.509
NetD29_2: D29.2 J.2@-113.284,-10.321 | length 11.8
  Top Layer w1: D29.2@-124.079,-12.065 -114.554,-12.065 -113.343,-10.854 -113.343,-10.38 J.2@-113.284,-10.321
NetD30_1: Backup.3 D30.1 U1.27 | length 75.6
  Top Layer w0.254: D30.1@-111.633,21.59 -111.512,21.469 D30.1 ; D30.1@-111.506,21.59 -111.506,21.469 D30.1 ; U1.27 -58.114,7.441 -61.595,10.922 -108.54,10.922 -113.289,15.671 -113.289,19.686 D30.1 ; -58.039,7.366 -57.606,7.366 -56.844,6.604 Backup.3
NetD30_2: D30.2 R13.1 SW2.3 SW2.4 | length 12.4
  Top Layer w1: R13.1 -120.801,23.61 -120.341,24.071 -118.296,24.071 SW2.3@-118.237,24.13 ; D30.2@-118.491,21.463 -118.491,21.584 -118.158,21.917 -118.158,24.119 SW2.3 SW2.4 -111.542,24.166 SW2.4@-111.506,24.13
NetD31_1: Backup.4 D31.1 U1.28 | length 58.6
  Top Layer w0.254: D31.1@-90.678,21.59 -90.678,21.469 D31.1 -92.964,19.183 -92.964,15.803 -90.115,12.954 -59.182,12.954 -55.574,9.346 U1.28 ; -55.499,6.604 Backup.4
NetD31_2: D31.2 R14.1 SW3.3 SW3.4 | length 5.1
  Top Layer w1: R14.1 -99.556,21.336 D31.2@-98.298,21.336 ; D31.2@-97.79,21.463 D31.2 -97.33,21.917 -97.33,24.096 SW3.3
NetD32_1: Backup.5 D32.1 U1.29 | length 36.7
  Top Layer w0.254: D32.1@-69.85,21.59 -69.856,21.584 D32.1 -69.856,17.405 -67.945,15.494 -58.547,15.494 -53.034,9.981 U1.29 ; -52.959,5.969 -52.653,5.969 -52.018,6.604 Backup.5
NetD32_2: D32.2 R15.1 SW4.3 SW4.4 | length 6
  Top Layer w1: R15.1 -79.871,21.463 D32.2@-77.089,21.463 ; D32.2 -76.728,21.691 -76.728,23.713 -76.327,24.114 SW4.3@-76.327,24.257
NetD33_1: Backup.6 D33.1 U1.30 | length 25.2
  Top Layer w0.254: U1.30 -50.494,5.715 ; Backup.6 -50.038,5.715 -50.494,5.715 ; -49.028,18.923 -49.028,21.203 D33.1@-48.768,21.463 ; -49.022,18.923 -49.022,18.596 -50.013,17.606 -50.673,16.945 -50.673,16.106 ccw(c-49.597,16.002) -50.673,15.898 -50.673,7.112 -50.494,6.933 -50.494,5.715
NetD33_2: D33.2 R17.1 SW5.3 SW5.4 | length 5
  Top Layer w1: R17.1 D33.2@-56.642,21.717 ; D33.2@-56.007,21.463 -56.007,21.584 -55.655,21.936 -55.655,24.071 SW5.3 ; SW5.3@-55.626,24.384 SW5.3@-55.464,24.222
NetD34_1: Backup.7 D34.1 U1.31 | length 38
  Top Layer w0.254: U1.31 -47.954,8.053 -41.783,14.224 -32.253,14.224 -30.734,15.743 -30.734,18.929 -28.327,21.336 D34.1@-28.067,21.336 ; -47.879,7.366 -47.446,7.366 -46.684,6.604 Backup.7
NetD34_2: D34.2 R18.1 SW6.3 SW6.4 | length 6.9
  Top Layer w1: R18.1 -37.527,23.483 -36.939,24.071 SW6.3@-34.804,24.071 ; D34.2@-35.433,21.463 D34.2 -34.804,21.959 SW6.3@-34.804,24.071 ; SW6.3 SW6.3@-34.804,24.071 ; SW6.3@-34.544,24.13 -34.603,24.071 SW6.3@-34.804,24.071
NetD35_1: Backup.8 D35.1 U1.32 | length 56.1
  Top Layer w0.254: U1.32 -45.414,7.418 -40.005,12.827 -12.441,12.827 -9.276,15.992 -9.276,19.559 -7.747,21.088 D35.1@-7.747,21.463 ; -45.339,5.842 -44.906,5.842 -44.144,6.604 Backup.8 ; D35.1@-7.372,21.33 D35.1@-7.239,21.463
NetD35_2: D35.2 R19.1 SW7.3 SW7.4 | length 6
  Top Layer w1: R19.1 -16.168,23.991 -16.088,24.071 -13.911,24.071 SW7.3@-13.843,24.003 ; D35.2 -13.716,22.219 -13.716,22.479 -13.763,22.526 -13.763,24.304 SW7.3@-13.843,24.384
NetD36_1: Backup.9 D36.1 U1.33 | length 74.8
  Top Layer w0.254: U1.33 -42.799,-1.068 -42.799,5.969 ; Backup.9 -41.858,6.604 -42.493,5.969 -42.799,5.969 ; D36.1@13.589,21.717 13.589,21.596 D36.1 11.298,19.305 11.298,15.13 10.392,14.224 -1.016,14.224 -4.318,10.922 -38.989,10.922 -42.799,7.112 -42.799,5.969
NetD36_2: D36.2 R20.1 SW8.3 SW8.4 | length 6.1
  Top Layer w1: R20.1 4.711,24.13 6.985,24.13 6.985,22.092 D36.2
NetD37_1: D37.1 U1.34 | length 91.5
  Top Layer w0.254: U1.34 -40.334,6.91 -37.973,9.271 27.056,9.271 32.958,15.173 32.958,20.137 33.877,21.056 33.877,21.368 D37.1@33.782,21.463
NetD37_2: D37.2 R21.1 SW9.3 SW9.4 | length 6.1
  Top Layer w1: R21.1 25.031,24.003 27.545,24.003 27.613,24.071 27.618,24.071 SW9.3@27.686,24.003 ; D37.2 28.194,22.473 28.194,23.495 SW9.3@27.813,23.876
NetD38_1: D38.1 U1.13 | length 128.1
  Bottom Layer w0.254: U1.13 -45.414,-17.093 -38.608,-10.287 17.018,-10.287 35.963,8.658 35.963,12.805 40.241,17.083 50.732,17.083 54.858,21.209 D38.1@54.991,21.209
NetD38_2: D38.2 R22.1 SW10.3 SW10.4 | length 6.4
  Top Layer w1: R22.1 46.149,24.166 48.463,24.166 48.641,24.344 SW10.3@48.641,24.384 ; D38.2 48.768,22.219 SW10.3@48.768,24.384
NetD39_1: D39.1 F2.1 | length 0.2
  Top Layer w0.254: D39.1@-86.995,-70.104 D39.1@-86.868,-70.231
NetD39_2: D39.2 U2.10
NetF1_2: F1.2 U1.19
NetK1_NC: K1.NC P1.2 | length 10.2
  Top Layer w4: K1.NC -139.223,54.579 P1.2@-136.906,56.896
NetK1_NO: K1.NO P1.1 | length 11.2
  Top Layer w4: P1.1@-131.826,56.896 -127.223,52.293 K1.NO
NetK2_NC: K2.NC P2.2 | length 10.3
  Top Layer w4: K2.NC -118.903,54.452 P2.2@-116.459,56.896
NetK2_NO: K2.NO P2.1 | length 11.1
  Top Layer w4: P2.1 -106.934,52.515 K2.NO@-106.934,47.625
NetK3_NC: K3.NC P3.2 | length 10.4
  Top Layer w4: K3.NC -98.583,54.071 P3.2@-95.758,56.896
NetK3_NO: K3.NO P3.1 | length 11
  Top Layer w4: P3.1@-90.678,56.896 -86.583,52.801 K3.NO
NetK4_NC: K4.NC P4.2 | length 10.5
  Top Layer w4: K4.NC -78.263,53.817 P4.2@-75.184,56.896
NetK4_NO: K4.NO P4.1 | length 10.9
  Top Layer w4: P4.1@-70.104,56.896 -66.263,53.055 K4.NO
NetK5_NC: K5.NC P5.2 | length 10.6
  Top Layer w4: K5.NC -57.943,53.602 P5.2
NetK5_NO: K5.NO P5.1 | length 10.8
  Top Layer w4: P5.1@-49.53,56.896 -45.943,53.309 K5.NO
NetK6_NC: K6.NC P6.2 | length 11.4
  Top Layer w4: K6.NC -37.623,54.452 -35.179,56.896 P6.2
NetK6_NO: K6.NO P6.1 | length 10.5
  Top Layer w4: P6.1@-28.956,56.769 -25.623,53.436 K6.NO
NetK7_NC: K7.NC P7.2 | length 10.9
  Top Layer w4: K7.NC -17.303,53.055 P7.2@-13.462,56.896
NetK7_NO: K7.NO P7.1 | length 10.5
  Top Layer w4: P7.1@-8.382,56.896 -5.303,53.817 K7.NO
NetK8_NC: K8.NC P8.2 | length 11
  Top Layer w4: K8.NC 3.017,52.801 P8.2@7.112,56.896
NetK8_NO: K8.NO P8.1 | length 10.5
  Top Layer w4: P8.1@12.065,56.896 15.017,53.944 K8.NO
NetK9_NC: K9.NC P10.2 | length 11.1
  Top Layer w4: K9.NC 23.337,52.547 P10.2@27.686,56.896
NetK9_NO: K9.NO P10.1 | length 10.2
  Top Layer w4: P10.1@32.766,56.769 35.337,54.198 K9.NO
NetK10_NC: K10.NC P12.2 | length 11.2
  Top Layer w4: K10.NC 43.657,52.293 P12.2
NetK10_NO: K10.NO P12.1 | length 10.1
  Top Layer w4: P12.1@53.34,56.769 55.657,54.452 K10.NO
NetP9_1: P9.1 U2.11 | length 73.8
  Bottom Layer w2: P9.1@-150.495,-52.451 P9.1 -106.299,-52.451 -97.028,-43.18 U2.11
NetP9_2: P9.2 U2.12 | length 73.7
  Bottom Layer w2: P9.2 -105.651,-54.991 -96.38,-45.72 U2.12
NetP9_3: P9.3 U2.13 | length 73.8
  Bottom Layer w2: P9.3@-150.495,-57.531 P9.3 -105.004,-57.531 -95.733,-48.26 U2.13
NetP9_4: P9.4 U2.14 | length 74
  Bottom Layer w2: P9.4@-150.622,-59.944 -104.229,-59.944 -95.085,-50.8 U2.14 ; P9.4@-150.495,-60.071 P9.4
NetP11_1: P11.1 U1.5 | length 99.2
  Top Layer w0.254: P11.1 P11.1@-148.4,0.064 ; -148.082,-0.254 P11.1@-148.4,0.064 ; U1.5@-65.405,-26.162 -65.512,-26.162 -65.734,-25.94 -65.734,-19.229 -69.088,-15.875 -132.461,-15.875 P11.1@-148.4,0.064
NetP13_1: P13.1 U1.6 | length 99.4
  Top Layer w0.254: P13.1@-149.227,-10.922 -138.716,-10.922 -130.754,-18.884 -89.237,-18.884 -75.494,-32.627 -66.179,-32.627 -63.194,-29.643 U1.6
NetP15_2: P15.2 U1.9 | length 72.1
  Top Layer w0.254: U1.9 -55.574,-17.093 -46.99,-8.509 -20.574,-8.509 -12.065,0 P15.2
NetP15_3: P15.3 U1.10 | length 67.6
  Top Layer w0.254: U1.10 -53.034,-18.744 -45.847,-11.557 -19.177,-11.557 -10.16,-2.54 -0.127,-2.54 P15.3@0,-2.667
NetQ1_2: Q1.2 R12.2 | length 9.4
  Top Layer w1: R12.2@-141.986,22.352 -141.986,21.443 -139.113,18.57 -138.839,18.57 Q1.2
NetQ2_2: Q2.2 R13.2 | length 9.1
  Top Layer w1: R13.2 -120.904,21.189 -118.408,18.692 -117.381,18.692 -114.939,16.25 -114.814,16.25 Q2.2@-114.808,16.256
NetQ3_2: Q3.2 R14.2 | length 7.5
  Top Layer w1: R14.2@-100.203,19.05 -100.203,18.62 -99.617,18.034 -96.266,18.034 Q3.2
NetQ4_2: Q4.2 R15.2 | length 8.7
  Top Layer w1: R15.2@-80.01,19.685 -80.01,18.669 -79.121,17.78 -75.057,17.78 Q4.2
NetQ5_2: Q5.2 R17.2 | length 8.4
  Top Layer w1: R17.2@-58.547,20.066 -58.547,19.509 -57.961,18.923 -55.118,18.923 Q5.2
NetQ6_2: Q6.2 R18.2 | length 8.9
  Top Layer w1: R18.2@-38.1,22.098 -38.1,21.697 -35.354,18.951 -34.699,18.951 Q6.2
NetQ7_2: Q7.2 R19.2 | length 9.4
  Top Layer w1: R19.2@-16.637,22.479 -16.637,21.062 -13.815,18.24 -13.033,18.24 Q7.2
NetQ8_2: Q8.2 R20.2 | length 8.8
  Top Layer w1: R20.2@4.064,21.971 4.064,21.189 6.81,18.443 6.957,18.443 Q8.2
NetQ9_2: Q9.2 R21.2 | length 10.4
  Top Layer w1: R21.2@24.638,22.225 24.638,21.443 27.511,18.57 28.928,18.57 Q9.2
NetQ10_2: Q10.2 R22.2 | length 9.6
  Top Layer w1: R22.2@45.593,22.225 45.593,21.316 48.212,18.697 49.375,18.697 Q10.2
NetR23_1: jst.6 R23.1 U1.12 | length 215.5
  Top Layer w0.254: v1(-69.596,6.477) -64.355,1.236 -64.355,-2.447 v1@-54.737,-12.065 ; U1.12 -47.954,-22.808 -45.974,-20.828 -30.099,-20.828 -23.749,-27.178 -23.749,-37.465 -19.685,-41.529 R23.1@-18.669,-41.529
  Bottom Layer w0.254: jst.6 -151.193,40.449 -151.193,41.39 -153.162,43.359 -153.162,48.322 -150.938,50.546 -134.62,50.546 -126.619,42.545 -83.334,42.545 -83.185,42.396 -83.185,19.939 v1@-69.723,6.477 ; v1(-54.864,-11.811) -47.954,-18.721 -47.954,-26.364 U1.12@-48.133,-26.543
NetR24_1: jst.5 R24.1 U1.11 | length 219.8
  Top Layer w0.254: U1.11@-50.546,-26.416 U1.11@-50.494,-26.468 ; v1(-50.419,-32.385) -50.457,-32.347 -50.457,-26.505 U1.11@-50.494,-26.468 ; R24.1@-19.177,-19.05 -19.177,-19.416 -19.261,-19.5 -47.313,-19.5 -50.494,-22.681 U1.11@-50.494,-26.468
  Bottom Layer w0.254: jst.5 -150.916,37.719 -118.271,5.074 -110.357,5.074 -79.137,-26.146 -79.137,-54.594 -73.152,-60.579 -66.04,-60.579 -58.674,-53.213 -58.674,-41.021 -50.546,-32.893 v1@-50.546,-32.385
NetR25_1: jst.4 R25.1 U1.8 | length 138.3
  Top Layer w0.254: R25.1@-126.873,-7.493 -121.285,-1.905 -91.567,-1.905 -85.09,-8.382 -66.548,-8.382 -58.114,-16.816 U1.8
  Bottom Layer w0.254: jst.4 -140.571,24.747 -140.571,10.777 v1(-124.587,-5.207)
NetR26_1: jst.3 R26.1 U1.7 | length 128.8
  Top Layer w0.254: R26.1 -90.764,-7.759 -86.458,-12.065 -66.675,-12.065 -60.706,-18.034 -60.706,-26.035 U1.7@-60.452,-26.289
  Bottom Layer w0.254: jst.3 -141.079,22.715 -141.079,9.848 -125.008,-6.223 -100.584,-6.223 v1(-99.06,-7.747)
NetR27_1: jst.7 R27.1 U1.35 | length 255.2
  Top Layer w0.254: U1.35 -37.794,0.994 -37.645,1.143 0.762,1.143 4.318,-2.413 4.318,-22.86 -20.574,-47.752 -20.574,-58.308 -19.446,-59.436 R27.1@-19.431,-59.436
  Bottom Layer w0.254: jst.7 -152.654,44.45 -152.654,48.111 -152.505,48.26 -141.993,48.26 -119.029,25.296 -114.339,25.296 -112.079,23.036 -101.929,23.036 -95.753,16.86 -95.753,15.992 -83.063,3.302 -41.402,3.302 U1.35@-37.719,-0.381
NetR28_1: jst.8 R28.1 U1.15 | length 254.4
  Top Layer w0.254: U1.15 -40.334,-53.392 -19.292,-74.434 -19.292,-77.5 -19.625,-77.832 -19.625,-79.648 -19.292,-79.98 R28.1
  Bottom Layer w0.254: jst.8 -115.23,9.566 -114.131,9.566 -75.89,-28.674 -75.89,-54.031 -71.374,-58.547 -64.726,-58.547 -62.23,-56.051 -62.23,-41.529 -51.562,-30.861 -44.652,-30.861 -40.461,-26.67 U1.15@-40.386,-26.67
NetU1_21: U1.21 U2.7 | length 44.9
  Bottom Layer w0.254: U1.21 -73.354,-8.053 -74.676,-9.375 -74.676,-36.957 -71.098,-40.535 U2.7@-67.84,-40.535 ; U2.7@-67.691,-40.767 U2.7@-67.564,-40.64
NetU1_22: U1.22 U2.8 | length 47.3
  Bottom Layer w0.254: U1.22 -70.814,-4.37 -59.309,-15.875 -59.309,-33.02 -64.389,-38.1 U2.8
NetU2_5: U2.5 U2.6 | length 2.6
  Bottom Layer w0.254: U2.6 -67.818,-45.593 U2.5@-67.691,-45.72
pads on no net: Designator27. Designator27.4 Designator27.5 Designator27.6 Designator27.7 Designator27.8 Designator27.9 Designator27.10 J.3 mh.MH_NP_6mm U1.1 U1.2 U1.3 U1.4 U1.14 U1.16 U1.17 U1.18 U1.23 U1.24 U1.26 U1.36 U1.37 U1.38 U2.1 U2.2 U2.3 U2.4
copper on no net:
  other v1: 56.261,-10.668 65.278,-10.668

## Polygon pours and split planes (outlines as drawn)
NetD11_2 on Bottom Layer "NETD11_2_L02_P028" (solid, pour order 28): -33.655,27.559 -33.655,29.718 -40.132,29.718 -40.132,5.588 -36.195,5.588 -36.195,27.559
NetF1_2 on Bottom Layer "NETF1_2_L02_P011" (solid, pour order 11): -51.943,-41.148 -28.702,-41.148 -28.702,-25.019 -31.623,-25.019 -31.623,-34.925 -51.943,-34.925 -51.943,-35.052 -51.943,-34.925 -51.943,-35.052
Net1_3 on Bottom Layer "NET1_3_L02_P009" (solid, pour order 9): -9.398,-13.081 15.113,-13.081 15.113,-91.059 71.755,-91.059 71.755,-97.79 -31.115,-97.79 -31.242,-97.663 -31.242,-85.852 -23.368,-85.852 -23.495,-85.979 -23.495,-92.837 0.127,-92.837 0.508,-92.456 0.508,-68.199 -9.398,-68.199 -9.398,-50.927 2.413,-50.927 2.032,-50.546 2.032,-30.48 -9.398,-30.48 -9.525,-30.353 -9.398,-30.226
Net3_2 on Bottom Layer "NET3_2_L02_P008" (solid, pour order 8): 15.113,-51.689 39.751,-51.689 39.751,-70.104 70.612,-70.104 70.612,-77.978 55.753,-77.978 55.753,-91.059 15.24,-91.059 15.113,-91.186
Net3_1 on Bottom Layer "NET3_1_L02_P006" (solid, pour order 6): 71.755,-51.562 71.755,-88.138 55.753,-88.138 55.753,-78.105 70.739,-78.105 70.739,-70.104 39.751,-70.104 39.751,-51.562
Net1_2 on Bottom Layer "NET1_2_L02_P003" (solid, pour order 3): 42.799,-12.954 15.113,-12.954 15.113,-51.435 55.372,-51.435 55.372,-38.862 70.866,-38.862 70.866,-29.083 42.799,-29.083
Net1_1 on Bottom Layer "NET1_1_L02_P002" (solid, pour order 2): 71.755,-12.7 71.755,-51.435 55.372,-51.435 55.372,-40.386 55.372,-38.989 70.104,-38.989 70.104,-29.464 42.799,-29.464 42.799,-12.7
NetU2_5 on Bottom Layer "NETU2_5_L02_P000" (solid, pour order 0): -69.469,-42.037 -65.532,-42.037 -65.532,-47.371 -69.469,-47.371
no net on Top Layer "NONET_L01_P035" (solid, pour order 35): 8.89,8.382 71.501,8.382 71.501,-12.7 71.12,-13.081 8.89,-13.081
NetD11_2 on Top Layer "NETD11_2_L01_P023" (solid, pour order 23): -148.209,-35.56 -139.573,-35.56 -139.573,-48.895 -154.686,-48.895 -154.686,41.021 -146.177,41.021 -146.177,39.878 -146.177,31.623 -152.019,31.623 -152.019,-35.56
NetD11_2 on Top Layer "NETD11_2_L01_P022" (solid, pour order 22): -149.686,41.021 71.628,41.021 71.755,40.894 71.628,40.767 71.628,14.605 -149.686,14.605
Net1_3 on Top Layer "NET1_3_L01_P034" (solid, pour order 34): -110.49,-18.923 -91.821,-18.923 -91.821,-54.356 -79.121,-54.356 -79.121,-57.023 -88.9,-57.023 -88.9,-97.79 -94.615,-97.79 -94.869,-97.536 -94.869,-61.468 -110.49,-61.468
GND on Top Layer "GND_L01_P033" (solid, pour order 33): -50.8,-82.804 -50.8,-76.327 -31.242,-76.327 -31.242,-93.599 -38.989,-93.599 -38.989,-85.979 -35.814,-85.979 -35.814,-78.994 -43.307,-78.994 -43.307,-82.804
Net1_3 on Top Layer "NET1_3_L01_P032" (solid, pour order 32): -31.242,-85.852 -23.495,-85.852 -23.495,-97.79 -94.615,-97.79 -94.615,-89.789 -38.989,-89.789 -38.989,-93.599 -31.242,-93.599
Net1_3 on Top Layer "NET1_3_L01_P030" (solid, pour order 30): -43.307,-78.994 -35.814,-78.994 -35.814,-85.979 -38.989,-85.979 -38.989,-97.79 -43.307,-97.79
Net*_3 on Top Layer "NET*_3_L01_P026" (solid, pour order 26): -2.54,1.524 -2.54,3.81 8.509,3.81 8.509,-97.79 -23.495,-97.79 -23.495,-76.327 -43.053,-76.327 -43.053,-64.262 -35.941,-64.262 -35.941,-73.533 -20.828,-73.533 -20.828,-95.25 6.096,-95.25 6.096,1.524
Net2_1 on Top Layer "NET2_1_L01_P020" (solid, pour order 20): -94.869,-87.63 -94.869,-63.246 -94.996,-63.373 -123.063,-63.246 -123.063,-94.996 -113.919,-94.996 -113.919,-87.63
Net2_2 on Top Layer "NET2_2_L01_P019" (solid, pour order 19): -113.919,-87.63 -94.869,-87.63 -94.869,-97.79 -113.919,-97.79
Net2_2 on Top Layer "NET2_2_L01_P018" (solid, pour order 18): -123.698,-95.123 -94.869,-95.123 -94.869,-97.79 -133.096,-97.79 -133.096,-97.028 -133.096,-63.373 -123.698,-63.373
GND on Top Layer "GND_L01_P017" (solid, pour order 17): 47.879,16.891 50.419,16.891 50.419,11.684 52.451,11.684 52.451,8.509 50.419,8.509 47.879,8.509
NetD39_2 on Top Layer "NETD39_2_L01_P016" (solid, pour order 16): -81.788,-42.037 -79.121,-42.037 -79.121,-42.164 -79.121,-42.291 -79.121,-57.023 -84.201,-57.023 -84.201,-57.404 -84.201,-71.374 -79.502,-71.374 -79.375,-71.247 -79.375,-60.579 -77.216,-60.579 -77.216,-59.944 -77.216,-36.576 -81.788,-36.576 -77.216,-36.576 -81.788,-36.576
NetD39_1 on Top Layer "NETD39_1_L01_P015" (solid, pour order 15): -85.09,-67.564 -85.09,-85.471 -69.088,-85.471 -69.088,-89.535 -88.9,-89.535 -88.9,-67.564
Net*_3 on Top Layer "NET*_3_L01_P014" (solid, pour order 14): -51.689,-72.009 -51.689,-62.865 -43.053,-62.865 -43.053,-70.485 -35.814,-70.485 -36.068,-60.833 -79.248,-60.833 -79.248,-72.009 -78.994,-72.009 -79.248,-72.009 -78.994,-72.009
NetD16_2 on Top Layer "NETD16_2_L01_P013" (solid, pour order 13): -56.515,-54.864 -56.515,-50.038 -41.91,-50.038 -41.91,-59.436 -51.943,-59.436 -51.943,-54.864
NetD16_1 on Top Layer "NETD16_1_L01_P012" (solid, pour order 12): -56.515,-55.753 -53.721,-55.753 -53.721,-60.833 -56.515,-60.833
GND on Top Layer "GND_L01_P010" (solid, pour order 10): -50.927,-63.754 -43.561,-63.754 -43.561,-82.931 -43.688,-82.804 -50.8,-82.804 -50.8,-63.881

## Silkscreen, mask and mechanical layers (free items; w line width, h text height)
Top Overlay:
  text "NC" at -143.129,59.055 h1.52
  text "NO" at -128.27,59.055 h1.52
  text "NC" at -122.047,59.055 h1.52
  text "NO" at -108.077,59.055 h1.52
  text "NC" at -101.727,59.055 h1.52
  text "NO" at -87.63,59.055 h1.52
  text "NC" at -80.899,59.055 h1.52
  text "NO" at 15.24,59.055 h1.52
  text "NC" at 21.971,59.055 h1.52
  text "NO" at 35.814,59.055 h1.52
  text "NC" at 42.545,59.055 h1.52
  text "NO" at -66.929,58.928 h1.52
  text "NC" at -60.452,58.928 h1.52
  text "NO" at -46.609,58.928 h1.52
  text "NC" at -39.624,58.928 h1.52
  text "NO" at -26.035,58.928 h1.52
  text "NC" at -19.05,58.928 h1.52
  text "NO" at -5.334,58.928 h1.52
  text "NC" at 1.397,58.928 h1.52
  text "NO" at 56.388,58.928 h1.52
  text "Gnd" at -68.072,5.969 h1.52
  text "Vcc" at -36.83,5.715 h1.52
  text "Vcc" at -0.381,3.937 h1.52
  text "H.M.R Creations" at -126.238,1.397 h3
  text "gnd" at -79.629,1.016 h1.52
  text "Limit_S_1" at -143.637,0.762 h1.52
  text "Gnd" at -143.256,-5.715 h1.52
  text "Gnd" at -116.84,-6.858 h1.52 r90
  text "Limit_S_2" at -143.764,-11.938 h1.52
  text "Gnd" at -143.129,-16.637 h1.52
  text "V+" at 2.794,-18.161 h1.52 r90
  text "Gnd" at -131.445,-29.21 h1.52
  text "V+" at -102.235,-29.337 h1.52
  text "Vin" at -30.988,-30.48 h1.52
  text "Gnd" at -24.13,-34.29 h1.52
  text "gnd" at -86.614,-38.227 h1.52
  text "5V" at -136.652,-41.148 h1.52 r90
  text "Vin" at -86.614,-41.402 h1.52
  text "Gnd" at 4.699,-47.244 h1.52 r90
  text "VMot" at -88.011,-56.388 h1.52
  text "V+" at 3.175,-60.198 h1.52 r90
  text "stepper" at -152.019,-65.278 h1.52
  text "Gnd" at -24.384,-74.422 h1.52
  text "UP Down" at 59.69,-83.566 h1.52
  text "12V" at -31.877,-84.836 h1.52
  text "Gnd" at 3.048,-87.63 h1.52 r90
Mechanical 13:
  lines w0.254: -154.686,57.023 cw(c-149.733,57.023) -149.733,61.976 66.675,61.976 cw(c66.675,56.896) 71.755,56.896 71.755,-92.71 cw(c66.675,-92.71) 66.675,-97.79 -149.686,-97.79 cw(c-149.686,-92.79) -154.686,-92.79 -154.686,57.15
Mechanical 15:
  lines w0.254: 96.12,61.601 96.12,61.576 ; 96.12,61.576 96.12,61.576